# Altium PCB Jacks.PcbDoc
Units mil, origin at the board's own origin, x right, y up, seen from the top; angles counter-clockwise.
Board outline 1712.6 x 4438.9 mil, 2 copper layers (Top Layer, Bottom Layer), stack 42.17 mil thick; 94 components, 63 nets, 300 pads, 111 vias.
Unrouted connection lines stored in the file: 1.
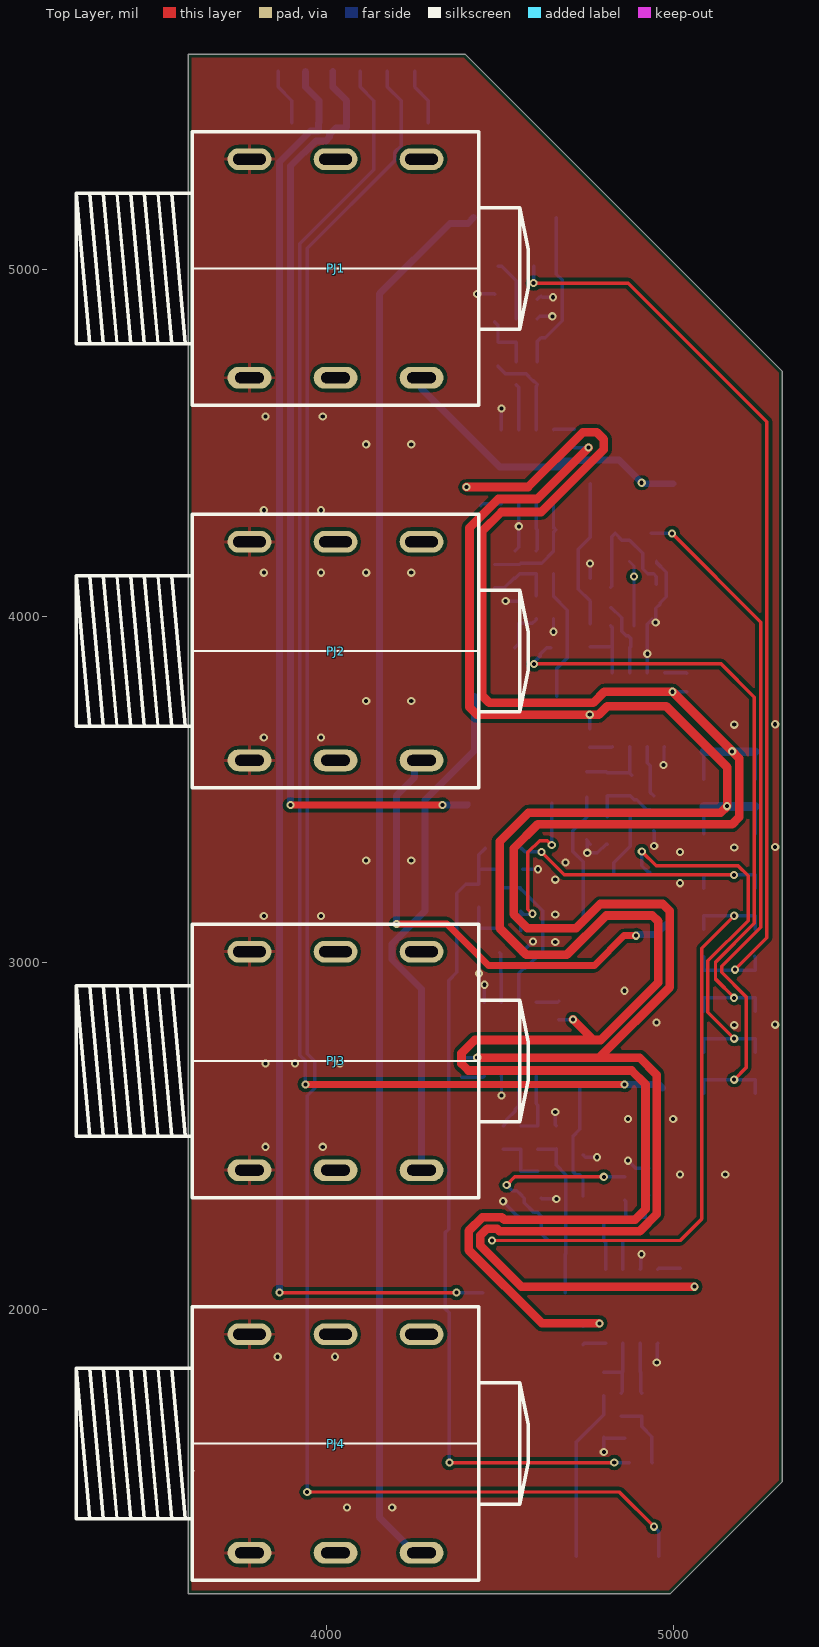
[diagram p0: Top Layer view]
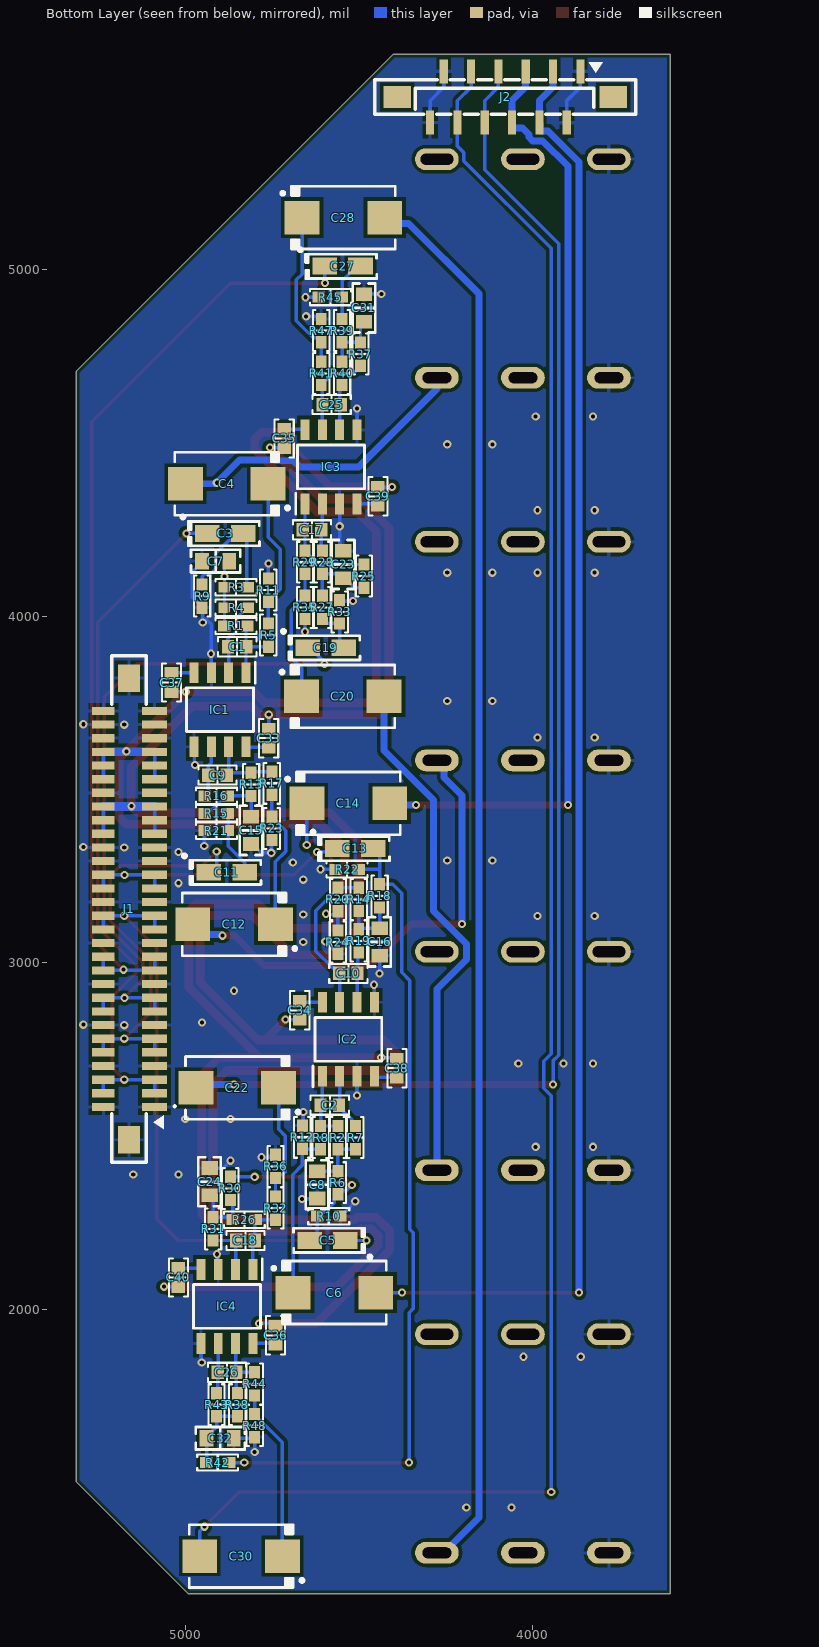
[diagram p1: Bottom Layer view, seen from below]
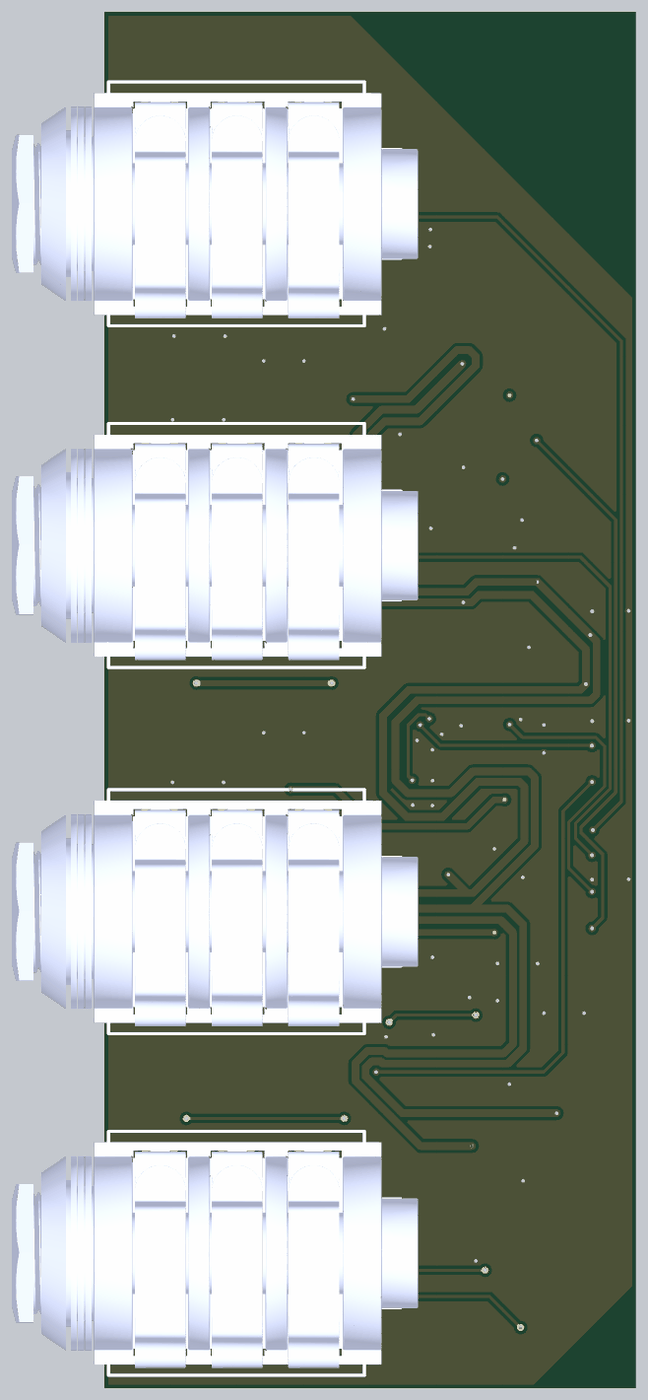
[diagram p2: 3D render of the assembled board from above, using the file's embedded part models]
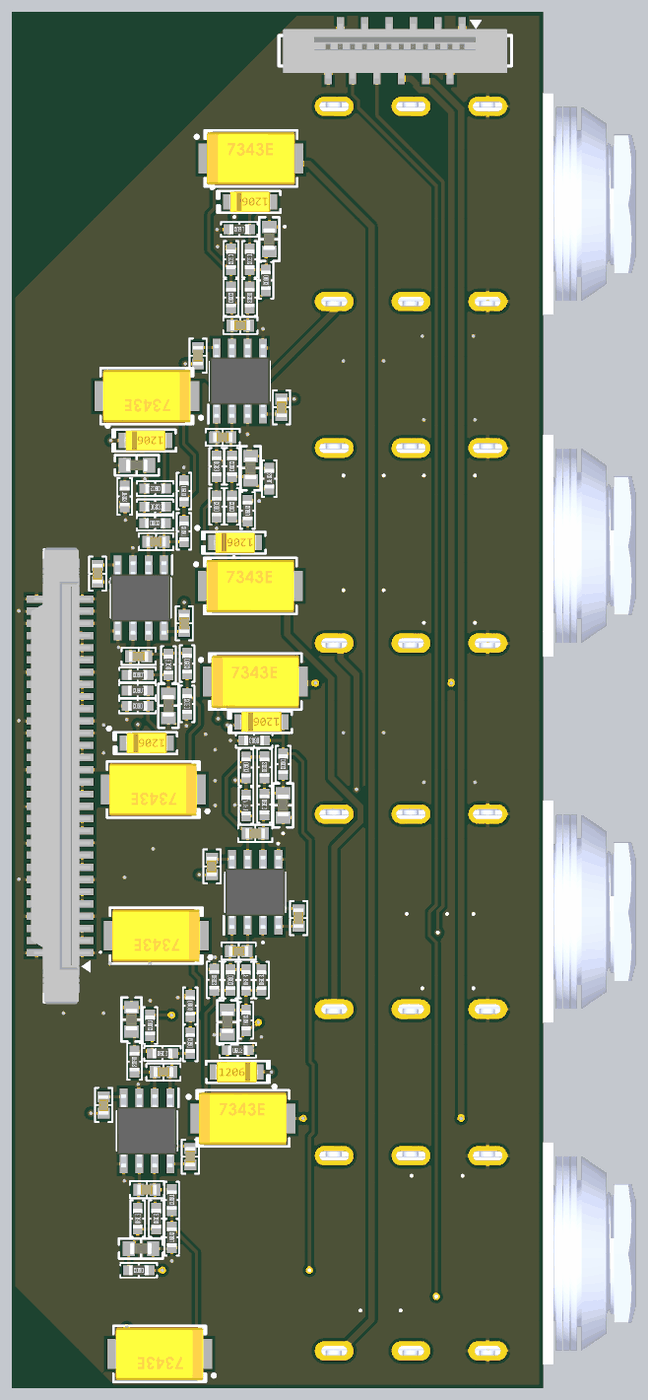
[diagram p3: 3D render of the assembled board from below, using the file's embedded part models]

## Layer stack, top to bottom
Top Solder: solder mask 0.4, Solder Resist, Dk 3.5
Top Layer: signal copper 1.4
Dielectric 1: dielectric 39.3701, FR-4, Dk 4.8
Bottom Layer: signal copper 1.4
Bottom Solder: solder mask 0.4, Solder Resist, Dk 3.5

## Board outline
3602.36,1181.1 3602.36,5620 4400,5620 5314.96,4705.04 5314.96,1504.96 4991.1,1181.1

## Design rules (kind name [scope] priority, off if disabled: settings)
BoardOutlineClearance [All] p1: gap=10 ignorepadtopadclearanceinfootprint=FALSE except(0: Arc-SplitContinuation Track-SplitContinuation SMDPad-SplitContinuation THPad-SplitContinuation Via-SplitContinuation Fill-SplitContinuation Poly-SplitContinuation Region-SplitContinuation Text-SplitContinuation)
Clearance [All] p1: gap=10 ignorepadtopadclearanceinfootprint=TRUE except(8: Arc-Arc Arc-Track Arc-SMDPad Track-Track Track-SMDPad)
HoleSize [All] p1: absolutevalues=TRUE maxlimit=157.48 minlimit=1 maxpercent=80.000 minpercent=20.000
MinimumSolderMaskSliver [All] p1: minsoldermaskwidth=4
PolygonConnect PolygonConnect_11 [All vs InNet('+5V')] p1: thpad.connectstyle=Relief thpad.reliefconductorwidth=10 thpad.reliefentries=4 thpad.polygonreliefangle="90 Angle" thpad.airgapwidth=10 smdpad.connectstyle=Relief smdpad.reliefconductorwidth=10 smdpad.reliefentries=4 smdpad.polygonreliefangle="90 Angle" smdpad.airgapwidth=10 via.connectstyle=Direct via.reliefconductorwidth=10 via.reliefentries=4 via.polygonreliefangle="90 Angle" via.airgapwidth=10
PolygonConnect PolygonConnect_10 [All vs InNet('+3V3_CODEC')] p2: thpad.connectstyle=Relief thpad.reliefconductorwidth=10 thpad.reliefentries=4 thpad.polygonreliefangle="90 Angle" thpad.airgapwidth=10 smdpad.connectstyle=Relief smdpad.reliefconductorwidth=10 smdpad.reliefentries=4 smdpad.polygonreliefangle="90 Angle" smdpad.airgapwidth=10 via.connectstyle=Direct via.reliefconductorwidth=10 via.reliefentries=4 via.polygonreliefangle="90 Angle" via.airgapwidth=10
PolygonConnect PolygonConnect_9 [All vs InNet('GND_A')] p3: thpad.connectstyle=Relief thpad.reliefconductorwidth=10 thpad.reliefentries=4 thpad.polygonreliefangle="90 Angle" thpad.airgapwidth=10 smdpad.connectstyle=Relief smdpad.reliefconductorwidth=10 smdpad.reliefentries=4 smdpad.polygonreliefangle="90 Angle" smdpad.airgapwidth=10 via.connectstyle=Direct via.reliefconductorwidth=10 via.reliefentries=4 via.polygonreliefangle="90 Angle" via.airgapwidth=10
PolygonConnect PolygonConnect_8 [All vs InNet('GND')] p4: thpad.connectstyle=Relief thpad.reliefconductorwidth=10 thpad.reliefentries=4 thpad.polygonreliefangle="90 Angle" thpad.airgapwidth=10 smdpad.connectstyle=Relief smdpad.reliefconductorwidth=10 smdpad.reliefentries=4 smdpad.polygonreliefangle="90 Angle" smdpad.airgapwidth=10 via.connectstyle=Direct via.reliefconductorwidth=10 via.reliefentries=4 via.polygonreliefangle="90 Angle" via.airgapwidth=10
PolygonConnect PolygonConnect_7 [All vs InNet('+MCU')] p5: thpad.connectstyle=Relief thpad.reliefconductorwidth=10 thpad.reliefentries=4 thpad.polygonreliefangle="90 Angle" thpad.airgapwidth=10 smdpad.connectstyle=Relief smdpad.reliefconductorwidth=10 smdpad.reliefentries=4 smdpad.polygonreliefangle="90 Angle" smdpad.airgapwidth=10 via.connectstyle=Direct via.reliefconductorwidth=10 via.reliefentries=4 via.polygonreliefangle="90 Angle" via.airgapwidth=10
PolygonConnect PolygonConnect_6 [All vs InNet('+5V')] p6: thpad.connectstyle=Relief thpad.reliefconductorwidth=10 thpad.reliefentries=4 thpad.polygonreliefangle="90 Angle" thpad.airgapwidth=10 smdpad.connectstyle=Relief smdpad.reliefconductorwidth=10 smdpad.reliefentries=4 smdpad.polygonreliefangle="90 Angle" smdpad.airgapwidth=10 via.connectstyle=Direct via.reliefconductorwidth=10 via.reliefentries=4 via.polygonreliefangle="90 Angle" via.airgapwidth=10
PolygonConnect PolygonConnect_5 [All vs IsNamedPolygon('+5V_L01_P002')] p7: thpad.connectstyle=Relief thpad.reliefconductorwidth=10 thpad.reliefentries=4 thpad.polygonreliefangle="90 Angle" thpad.airgapwidth=10 smdpad.connectstyle=Direct smdpad.reliefconductorwidth=10 smdpad.reliefentries=4 smdpad.polygonreliefangle="90 Angle" smdpad.airgapwidth=10 via.connectstyle=Direct via.reliefconductorwidth=10 via.reliefentries=4 via.polygonreliefangle="90 Angle" via.airgapwidth=10
PolygonConnect PolygonConnect_4 [All vs IsNamedPolygon('V_USB_L01_P001')] p8: thpad.connectstyle=Relief thpad.reliefconductorwidth=10 thpad.reliefentries=4 thpad.polygonreliefangle="90 Angle" thpad.airgapwidth=10 smdpad.connectstyle=Direct smdpad.reliefconductorwidth=10 smdpad.reliefentries=4 smdpad.polygonreliefangle="90 Angle" smdpad.airgapwidth=10 via.connectstyle=Direct via.reliefconductorwidth=10 via.reliefentries=4 via.polygonreliefangle="90 Angle" via.airgapwidth=10
PolygonConnect PolygonConnect_3 [All vs IsNamedPolygon('NETD1_1_L01_P003')] p9: thpad.connectstyle=Relief thpad.reliefconductorwidth=10 thpad.reliefentries=4 thpad.polygonreliefangle="90 Angle" thpad.airgapwidth=10 smdpad.connectstyle=Direct smdpad.reliefconductorwidth=10 smdpad.reliefentries=4 smdpad.polygonreliefangle="90 Angle" smdpad.airgapwidth=10 via.connectstyle=Direct via.reliefconductorwidth=10 via.reliefentries=4 via.polygonreliefangle="90 Angle" via.airgapwidth=10
PolygonConnect PolygonConnect_2 [All vs IsNamedPolygon('GND_L01_P005')] p10: thpad.connectstyle=Relief thpad.reliefconductorwidth=10 thpad.reliefentries=4 thpad.polygonreliefangle="90 Angle" thpad.airgapwidth=10 smdpad.connectstyle=Direct smdpad.reliefconductorwidth=10 smdpad.reliefentries=4 smdpad.polygonreliefangle="90 Angle" smdpad.airgapwidth=10 via.connectstyle=Direct via.reliefconductorwidth=10 via.reliefentries=4 via.polygonreliefangle="90 Angle" via.airgapwidth=10
PolygonConnect PolygonConnect_1 [All vs IsNamedPolygon('6V6_L01_P001')] p11: thpad.connectstyle=Relief thpad.reliefconductorwidth=10 thpad.reliefentries=4 thpad.polygonreliefangle="90 Angle" thpad.airgapwidth=10 smdpad.connectstyle=Direct smdpad.reliefconductorwidth=10 smdpad.reliefentries=4 smdpad.polygonreliefangle="90 Angle" smdpad.airgapwidth=10 via.connectstyle=Direct via.reliefconductorwidth=10 via.reliefentries=4 via.polygonreliefangle="90 Angle" via.airgapwidth=10
PolygonConnect [All] p12: connectstyle=Relief reliefconductorwidth=10 reliefentries=4 polygonreliefangle="90 Angle" airgapwidth=10
RoomDefinition Jacks [InComponentClass('Jacks')] p1: confinementstyle=ConfineIn formatcopy=TRUE lockcomponents=FALSE outline 0,0 2000,0 2000,1000 0,1000
RoutingVias [All] p1: holewidth=11.81 width=23.62 viastyle="Through Hole" minholewidth=11.81 minwidth=23.62 maxholewidth=11.81 maxwidth=23.62
SolderMaskExpansion [All] p1: expansion=2 istentingtop=FALSE
Width [All] p1: maxlimit=50 minlimit=8 preferedwidth=8
28 further rules are at their usual default settings.

## Components (designator, comment, footprint, x,y, rotation, side; value= is the part's Value field where it differs from the comment)
C1 "22 pF" "CAP 0603_1608" 4850.47,3911.42 r0 bottom
C2 "22 pF" "CAP 0603_1608" 4583.43,2590 r180 bottom
C3 "10µF" "CAP POL 1206_3216" 4884.73,4238.22 r180 bottom
C4 "47µF" "CAP POL 2917_7343" 4880.47,4381.42 r0 bottom
C5 "10µF" "CAP POL 1206_3216" 4590,2200 r0 bottom
C6 "47µF" "CAP POL 2917_7343" 4570,2050 r180 bottom
C7 "10000 pF" "MURATA GRM188 0603_1608" 4912.52,4158.22 r180 bottom
C8 "10000 pF" "MURATA GRM188 0603_1608" 4620,2360.63 r90 bottom
C9 "22 pF" "CAP 0603_1608" 4907.05,3541.42 r0 bottom
C10 "22 pF" "CAP 0603_1608" 4530,2970 r180 bottom
C11 "10µF" "CAP POL 1206_3216" 4880.47,3261.42 r180 bottom
C12 "47µF" "CAP POL 2917_7343" 4859.57,3111.42 r0 bottom
C13 "10µF" "CAP POL 1206_3216" 4510,3330 r180 bottom
C14 "47µF" "CAP POL 2917_7343" 4530,3460 r180 bottom
C15 "10000 pF" "MURATA GRM188 0603_1608" 4810.47,3382.05 r90 bottom
C16 "10000 pF" "MURATA GRM188 0603_1608" 4440,3060.63 r90 bottom
C17 "22 pF" "CAP 0603_1608" 4635,4248.58 r180 bottom
C18 "22 pF" "CAP 0603_1608" 4826.57,2200 r0 bottom
C19 "10µF" "CAP POL 1206_3216" 4595,3908.58 r180 bottom
C20 "47µF" "CAP POL 2917_7343" 4545.91,3768.58 r180 bottom
C22 "47µF" "CAP POL 2917_7343" 4850,2640 r0 bottom
C23 "10000 pF" "MURATA GRM188 0603_1608" 4545,4148.58 r270 bottom
C24 "10000 pF" "MURATA GRM188 0603_1608" 4930,2369.37 r270 bottom
C25 "22 pF" "CAP 0603_1608" 4578.19,4609.53 r180 bottom
C26 "22 pF" "CAP 0603_1608" 4880,1820 r0 bottom
C27 "10µF" "CAP POL 1206_3216" 4546.57,5008.58 r180 bottom
C28 "47µF" "CAP POL 2917_7343" 4544.09,5148.58 r180 bottom
C30 "47µF" "CAP POL 2917_7343" 4839.09,1290 r0 bottom
C31 "10000 pF" "MURATA GRM188 0603_1608" 4485,4887.95 r270 bottom
C32 "10000 pF" "MURATA GRM188 0603_1608" 4899.37,1630 r0 bottom
C33 "0.1 µF" "CAP 0603_1608" 4759.57,3647.99 r90 bottom
C34 "0.1 µF" "CAP 0603_1608" 4670,2863.43 r270 bottom
C35 "0.1 µF" "CAP 0603_1608" 4715,4512.01 r270 bottom
C36 "0.1 µF" "CAP 0603_1608" 4740,1926.57 r90 bottom
C37 "0.1 µF" "CAP 0603_1608" 5039.57,3808.27 r90 bottom
C38 "0.1 µF" "CAP 0603_1608" 4390,2696.57 r270 bottom
C39 "0.1 µF" "CAP 0603_1608" 4445,4345.16 r270 bottom
C40 "0.1 µF" "CAP 0603_1608" 5020,2093.43 r90 bottom
IC1 "NE5532DRE4" SOIC127P600X175-8N 4900,3730 r270 bottom
IC2 "NE5532DRE4" SOIC127P600X175-8N 4530,2780 r90 bottom
IC3 "NE5532DRE4" SOIC127P600X175-8N 4580,4430 r90 bottom
IC4 "NE5532DRE4" SOIC127P600X175-8N 4880,2010 r270 bottom
J1 "3-1734248-0" 317342480 5148.62,3155.72 r270 bottom
J2 "0528081271" AFA11-S12GLA-00 3861.26,5570 r0 bottom
PJ1 "PJ-609AE" PJ609AE 3778.72,4686.87 r0 top
PJ2 "PJ-609AE" PJ609AE 3778.72,3584.08 r0 top
PJ3 "PJ-609AE" PJ609AE 3778.72,2402.56 r0 top
PJ4 "PJ-609AE" PJ609AE 3778.72,1299.77 r0 top
R1 "6.81 kOhms" "YAGEO RES 0603_1608" 4853.94,3971.42 r180 bottom
R2 "6.81 kOhms" "YAGEO RES 0603_1608" 4560,2496.54 r90 bottom
R3 "1.47 kOhms" "YAGEO RES 0603_1608" 4853.31,4083.03 r0 bottom
R4 "221 Ohms" "YAGEO RES 0603_1608" 4853.31,4023.97 r180 bottom
R5 "1 kOhms" "YAGEO RES 0603_1608" 4760.47,3944.88 r90 bottom
R6 "1.47 kOhms" "YAGEO RES 0603_1608" 4560,2366.54 r90 bottom
R7 "221 Ohms" "YAGEO RES 0603_1608" 4510,2496.54 r90 bottom
R8 "1 kOhms" "YAGEO RES 0603_1608" 4610,2496.54 r270 bottom
R9 "51 kOhms" "YAGEO RES 0603_1608" 4951.74,4057.44 r270 bottom
R10 "51 kOhms" "YAGEO RES 0603_1608" 4586.54,2270 r180 bottom
R11 "191 Ohms" "YAGEO RES 0603_1608" 4760.47,4074.88 r270 bottom
R12 "191 Ohms" "YAGEO RES 0603_1608" 4662.47,2497.54 r270 bottom
R13 "6.81 kOhms" "YAGEO RES 0603_1608" 4810.47,3514.88 r90 bottom
R14 "6.81 kOhms" "YAGEO RES 0603_1608" 4500,3183.46 r90 bottom
R15 "1.47 kOhms" "YAGEO RES 0603_1608" 4910.16,3431.42 r0 bottom
R16 "221 Ohms" "YAGEO RES 0603_1608" 4910.16,3481.42 r0 bottom
R17 "1 kOhms" "YAGEO RES 0603_1608" 4750.47,3517.95 r270 bottom
R18 "1.47 kOhms" "YAGEO RES 0603_1608" 4440,3193.46 r270 bottom
R19 "221 Ohms" "YAGEO RES 0603_1608" 4500,3063.46 r270 bottom
R20 "1 kOhms" "YAGEO RES 0603_1608" 4559.9,3182.93 r270 bottom
R21 "51 kOhms" "YAGEO RES 0603_1608" 4910.16,3381.42 r0 bottom
R22 "51 kOhms" "YAGEO RES 0603_1608" 4533.46,3270 r0 bottom
R23 "191 Ohms" "YAGEO RES 0603_1608" 4750.47,3387.95 r90 bottom
R24 "191 Ohms" "YAGEO RES 0603_1608" 4560,3060 r90 bottom
R25 "6.81 kOhms" "YAGEO RES 0603_1608" 4485,4115.12 r90 bottom
R26 "6.81 kOhms" "YAGEO RES 0603_1608" 4830,2260 r180 bottom
R27 "1.47 kOhms" "YAGEO RES 0603_1608" 4605,4025.12 r90 bottom
R28 "221 Ohms" "YAGEO RES 0603_1608" 4605,4155.12 r90 bottom
R29 "1 kOhms" "YAGEO RES 0603_1608" 4655,4155.12 r270 bottom
R30 "1.47 kOhms" "YAGEO RES 0603_1608" 4870,2350 r270 bottom
R31 "221 Ohms" "YAGEO RES 0603_1608" 4920,2233.46 r270 bottom
R32 "1 kOhms" "YAGEO RES 0603_1608" 4740,2293.46 r90 bottom
R33 "51 kOhms" "YAGEO RES 0603_1608" 4555,4012.05 r90 bottom
R35 "191 Ohms" "YAGEO RES 0603_1608" 4655,4025.12 r90 bottom
R36 "191 Ohms" "YAGEO RES 0603_1608" 4740,2413.46 r270 bottom
R37 "6.81 kOhms" "YAGEO RES 0603_1608" 4495,4755.12 r270 bottom
R38 "6.81 kOhms" "YAGEO RES 0603_1608" 4850,1726.54 r90 bottom
R39 "1.47 kOhms" "YAGEO RES 0603_1608" 4548.19,4822.99 r270 bottom
R40 "221 Ohms" "YAGEO RES 0603_1608" 4548.19,4699.53 r270 bottom
R41 "1 kOhms" "YAGEO RES 0603_1608" 4608.19,4699.53 r90 bottom
R42 "1.47 kOhms" "YAGEO RES 0603_1608" 4906.54,1560 r0 bottom
R43 "221 Ohms" "YAGEO RES 0603_1608" 4910,1726.54 r90 bottom
R44 "1 kOhms" "YAGEO RES 0603_1608" 4800,1786.54 r270 bottom
R45 "51 kOhms" "YAGEO RES 0603_1608" 4581.65,4919.53 r0 bottom
R47 "191 Ohms" "YAGEO RES 0603_1608" 4608.19,4822.99 r270 bottom
R48 "191 Ohms" "YAGEO RES 0603_1608" 4800,1666.54 r90 bottom

## Footprints (in the part's own frame and the unit in brackets; to place one, negate y for a bottom-side part, rotate by r counter-clockwise, add the part's x,y. Pads: shape width x height; smd on the part's side, far side on the other; paste and mask are expansions set on the pad)
317342480 [mm]
  rect 0.6x1.85 smd: 1(14.5,1.525) 3(13.5,1.525) 5(12.5,1.525) 7(11.5,1.525) 9(10.5,1.525) 11(9.5,1.525) 13(8.5,1.525) 15(7.5,1.525) 17(6.5,1.525) 19(5.5,1.525) 21(4.5,1.525) 23(3.5,1.525) 25(2.5,1.525) 27(1.5,1.525) 29(0.5,1.525) 31(-0.5,1.525) 33(-1.5,1.525) 35(-2.5,1.525) 37(-3.5,1.525) 39(-4.5,1.525) 41(-5.5,1.525) 43(-6.5,1.525) 45(-7.5,1.525) 47(-8.5,1.525) 49(-9.5,1.525) 51(-10.5,1.525) 53(-11.5,1.525) 55(-12.5,1.525) 57(-13.5,1.525) 59(-14.5,1.525)
  rect 0.6x1.65 smd: 2(14.5,-2.225) 4(13.5,-2.225) 6(12.5,-2.225) 8(11.5,-2.225) 10(10.5,-2.225) 12(9.5,-2.225) 14(8.5,-2.225) 16(7.5,-2.225) 18(6.5,-2.225) 20(5.5,-2.225) 22(4.5,-2.225) 24(3.5,-2.225) 26(2.5,-2.225) 28(1.5,-2.225) 30(0.5,-2.225) 32(-0.5,-2.225) 34(-1.5,-2.225) 36(-2.5,-2.225) 38(-3.5,-2.225) 40(-4.5,-2.225) 42(-5.5,-2.225) 44(-6.5,-2.225) 46(-7.5,-2.225) 48(-8.5,-2.225) 50(-9.5,-2.225) 52(-10.5,-2.225) 54(-11.5,-2.225) 56(-12.5,-2.225) 58(-13.5,-2.225) 60(-14.5,-2.225)
  rect 2x1.6 smd paste+0 mask+0.05: 31(-16.9,-0.35) 32(16.9,-0.35)
  silkscreen extent -18.54,-1.6 18.54,3.05, body extent -18.7,-2.68 18.7,2.17, height 5.68
AFA11-S12GLA-00 [mm]
  rect 0.6x1.75 smd paste+0 mask+0.05: 1(0,0) 2(1,3.75) 3(2,0) 4(3,3.75) 5(4,0) 6(5,3.75) 7(6,0) 8(7,3.75) 9(8,0) 10(9,3.75) 11(10,0) 12(11,3.75)
  rect 2x1.6 smd paste+0 mask+0.05: 13(13.4,1.875) 14(-2.4,1.875)
  silkscreen extent -4.04,-0.66 15.04,3.13, body extent -3.69,-0.35 14.71,4.16, height 5.35
"CAP 0603_1608" [mm] "Chip Capacitor, 2-Leads, Body 1.60x0.80mm, IPC Medium Density"
  rect 0.9x1 smd: 1(-0.675,0) 2(0.675,0)
  silkscreen extent -1.4,-0.7 1.4,0.7, body extent -0.8,-0.41 0.8,0.41, height 0.82
"CAP POL 1206_3216" [mm] "Molded Capacitor, 2-Leads, Body 3.20x1.6mm, IPC Medium Density"
  rect 1.8x1.23 smd: 1(-1.31,0) 2(1.31,0)
  silkscreen extent -3.23,-0.9 2.5,1.32, body extent -1.72,-0.85 1.71,0.85, height 1.7
"CAP POL 2917_7343" [mm] "Molded Capacitor, 2-Leads, Body 7.30x4.30mm, IPC Medium Density"
  rect 2.55x2.45 smd: 1(-3.025,0) 2(3.025,0)
  silkscreen extent -4.57,-2.3 3.8,2.3, body extent -3.65,-2.15 3.65,2.15, height 4.1
"MURATA GRM188 0603_1608" [mm] "Chip Capacitor, 2-Leads, Body 1.60x0.80mm"
  rect 1x1.2 smd: 1(-1,0) 2(1,0)
  silkscreen extent -1.8,-0.83 1.8,0.83, body extent -0.9,-0.5 0.9,0.5, height 1
PJ609AE [mm] "HOOYA"
  oval 3.2x1.6 hole 0.8 slot 2.1 at 0 deg paste-2539.97 mask+0.051: 2(0,0) 4(6.3,0) 6(12.6,0)
  oval 3.2x1.6 hole 0.8 slot 2.4 at 0 deg paste-2539.97 mask+0.051: 3(0,16) 5(6.3,16) 7(12.6,16)
  silkscreen extent -12.7,-2 20.4,18, body extent -12.16,-1.4 21.2,17.09, height 16.2
SOIC127P600X175-8N [mm]
  rect 1.525x0.65 smd: 1(-2.712,1.905) 2(-2.712,0.635) 3(-2.712,-0.635) 4(-2.712,-1.905) 5(2.712,-1.905) 6(2.712,-0.635) 7(2.712,0.635) 8(2.712,1.905)
  silkscreen extent -3.47,-2.45 1.6,2.58, body extent -3,-2.45 3,2.45, height 1.75
"YAGEO RES 0603_1608" [mm] "Chip Resistor, 2-Leads, Body 1.60x0.80mm"
  rect 0.9x0.8 smd: 1(-0.85,0) 2(0.85,0)
  silkscreen extent -1.5,-0.6 1.5,0.6, body extent -0.8,-0.4 0.8,0.4, height 0.45

## Part data
C1 C2 C9 C10 C17 C18 C25 C26: library part CC0603GRNPO9BN220, "CAP CER 22PF 50V C0G/NPO 0603", Device Package="0603 (1608 Metric)", Manufacturer=Yageo, Operating Temperature="-55°C ~ 125°C", Supplier Part Number 1=311-3925-1-ND, Temperature Coefficient="C0G, NP0", Tolerance=±2%, Voltage - Rated=50V, Applications="General Purpose", Capacitance="22 pF", ComponentLink1Description=Datasheet, ComponentLink1URL=https://www.yageo.com/upload/media/product/productsearch/datasheet/mlcc/UPY-GP_NP0_16V-to-50V_17.pdf, ComponentLink2Description="DigiKey Link", ComponentLink2URL=https://www.digikey.com/en/products/detail/yageo/CC0603GRNPO9BN220/5883550, LastUpdated="2/9/2024 8:10:28 PM", Lifecycle Status=Active, Minimum Order=1, Mounting Type="Surface Mount, MLCC", Package / Case="0603 (1608 Metric)", Packaging=TapeAndReel, Part Number=CC0603GRNPO9BN220, Part Status=Active, PartId=3677, Price=0.01, Series=CC, Size / Dimension="0.063\" L x 0.031\" W (1.60mm x 0.80mm)", Supplier 1=DigiKey, Thickness (Max)="0.035\" (0.90mm)"
C3 C5 C11 C13 C19 C27: library part T491A106K010AT, "CAP TANT 10UF 10% 10V 1206", Device Package="1206 (3216 Metric)", ESR (Equivalent Series Resistance)=3.8Ohm, Lifetime @ Temp.="2000 Hrs @ 125°C", Manufacturer=KEMET, Manufacturer Size Code=A, Operating Temperature="-55°C ~ 125°C", Supplier Part Number 1=399-3684-1-ND, Tolerance=±10%, Voltage - Rated=10V, Capacitance=10µF, ComponentLink1Description=Datasheet, ComponentLink1URL=https://api.kemet.com/component-edge/download/datasheet/T491A106K010AT.pdf, ComponentLink2Description="DigiKey Link", ComponentLink2URL=http://digikey.com/product-detail/en/kemet/T491A106K010AT/399-3684-1-ND/819009, Features="General Purpose", Height - Seated (Max)="0.071\" (1.80mm)", LastUpdated="9/2/2020 1:15:58 AM", Lifecycle Status=Active, Minimum Order=1, Mounting Type="Surface Mount", Package / Case="1206 (3216 Metric)", Packaging=TapeAndReel, Part Number=T491A106K010AT, Part Status=Active, PartId=330, Price=0.07, Series=T491, Size / Dimension="0.126\" L x 0.063\" W (3.20mm x 1.60mm)", Supplier 1=DigiKey, Type=Molded
C4 C6 C12 C14 C20 C22 C28 C30: library part 293D476X9010D2TE3, "CAP TANT 47UF 10% 10V 2917", Device Package="2917 (7343 Metric)", ESR (Equivalent Series Resistance)=700mOhm, Manufacturer="Vishay Sprague", Manufacturer Size Code=D, Operating Temperature="-55°C ~ 125°C", Supplier Part Number 1=718-1088-1-ND, Tolerance=±10%, Voltage - Rated=10V, Capacitance=47µF, ComponentLink1Description=Datasheet, ComponentLink1URL=http://www.vishay.com/docs/40002/293d.pdf, ComponentLink2Description="DigiKey Link", ComponentLink2URL=http://digikey.com/product-detail/en/vishay-sprague/293D476X9010D2TE3/718-1088-1-ND/1559582, Features="General Purpose", Height - Seated (Max)="0.122\" (3.10mm)", LastUpdated="9/2/2020 1:16:14 AM", Lifecycle Status=Active, Minimum Order=1, Mounting Type="Surface Mount", Package / Case="2917 (7343 Metric)", Packaging=TapeAndReel, Part Number=293D476X9010D2TE3, Part Status=Active, PartId=2778, Price=0.22, Series="TANTAMOUNT®, 293D", Size / Dimension="0.287\" L x 0.169\" W (7.30mm x 4.30mm)", Supplier 1=DigiKey, Type=Molded
C7 C8 C15 C16 C23 C24 C31 C32: library part GRM1885C1H103JA01D, "CAP CER 10000PF 50V C0G/NP0 0603", Device Package="0603 (1608 Metric)", Manufacturer="Murata Electronics", Operating Temperature="-55°C ~ 125°C", Supplier Part Number 1=490-9666-1-ND, Temperature Coefficient="C0G, NP0", Tolerance=±5%, Voltage - Rated=50V, Applications="General Purpose", Capacitance="10000 pF", ComponentLink1Description=Datasheet, ComponentLink1URL=https://www.murata.com/~/media/webrenewal/support/library/catalog/products/capacitor/mlcc/c02e.ashx?la=en-us, ComponentLink2Description="DigiKey Link", ComponentLink2URL=https://www.digikey.com/en/products/detail/murata-electronics/GRM1885C1H103JA01D/4421555, LastUpdated="7/20/2024 12:23:21 AM", Lifecycle Status=Active, Minimum Order=1, Mounting Type="Surface Mount, MLCC", Package / Case="0603 (1608 Metric)", Packaging=TapeAndReel, Part Number=GRM1885C1H103JA01D, Part Status=Active, PartId=11077, Price=0.02, Series=GRM, Size / Dimension="0.063\" L x 0.031\" W (1.60mm x 0.80mm)", Supplier 1=DigiKey, Thickness (Max)="0.035\" (0.90mm)"
C33 C34 C35 C36 C37 C38 C39 C40: library part C0603C104K5RAC7411, "CAP CER 0.1UF 50V X7R 0603", Device Package="0603 (1608 Metric)", Manufacturer=KEMET, Operating Temperature="-55°C ~ 125°C", Supplier Part Number 1=399-C0603C104K5RAC7411CT-ND, Temperature Coefficient=X7R, Tolerance=±10%, Voltage - Rated=50V, Applications="Bypass, Decoupling", Capacitance="0.1 µF", ComponentLink1Description=Datasheet, ComponentLink1URL=https://api.kemet.com/component-edge/download/datasheet/C0603C104K5RAC7411.pdf, ComponentLink2Description="DigiKey Link", ComponentLink2URL=https://www.digikey.com/en/products/detail/kemet/C0603C104K5RAC7411/3317013, LastUpdated="2/9/2024 8:10:30 PM", Lifecycle Status=Active, Minimum Order=1, Mounting Type="Surface Mount, MLCC", Package / Case="0603 (1608 Metric)", Packaging=TapeAndReel, Part Number=C0603C104K5RAC7411, Part Status=Active, PartId=2233, Price=0.01, Series="SMD Comm X7R", Size / Dimension="0.063\" L x 0.031\" W (1.60mm x 0.80mm)", Supplier 1=DigiKey, Thickness (Max)="0.035\" (0.90mm)"
IC1 IC2 IC3 IC4: "Integrated Circuit", Manufacturer_Name="Texas Instruments", Mouser Part Number=595-NE5532DRE4, Arrow Part Number=NE5532DRE4, Arrow Price/Stock=https://www.arrow.com/en/products/ne5532dre4/texas-instruments, Datasheet Link=https://www.ti.com/lit/ds/symlink/ne5532.pdf?HQS=dis-mous-null-mousermode-dsf-pf-null-wwe&ts=1618482303902&ref_url=https%253A%252F%252Fwww.mouser.com%252F, Height=1.75mm, Manufacturer_Part_Number=NE5532DRE4, Mouser Price/Stock=https://www.mouser.co.uk/ProductDetail/Texas-Instruments/NE5532DRE4?qs=7nS3%252BbEUL6spPf9Rt7S6cg%3D%3D
J1: "Connector", Manufacturer_Name="TE Connectivity", Mouser Part Number=571-3-1734248-0, Arrow Part Number=3-1734248-0, Arrow Price/Stock=https://www.arrow.com/en/products/3-1734248-0/te-connectivity, Datasheet Link=https://www.te.com/commerce/DocumentDelivery/DDEController?Action=srchrtrv&DocNm=5-1773461-0_Standard_FPC_Connectors_QRG&DocType=Data%20Sheet&DocLang=English&PartCntxt=3-1734248-0&DocFormat=pdf, Height=7.7mm, Manufacturer_Part_Number=3-1734248-0, Mouser Price/Stock=https://www.mouser.co.uk/ProductDetail/TE-Connectivity/3-1734248-0?qs=rVE9j%252BL6g1a4TQRjUuGYiA%3D%3D, System=Connector
J2: "Connector", Manufacturer_Name=Molex, Datasheet Link=https://www.molex.com/pdm_docs/sd/528082071_sd.pdf, Height=5.3mm, Manufacturer_Part_Number=0528081271, System=Connector
PJ1 PJ2 PJ3 PJ4: "6.3mm jack HOOYA"
R1 R2 R13 R14 R25 R26 R37 R38: library part AC0603FR-076K81L, "RES SMD 6.81K OHM 1% 1/10W 0603", Device Package="0603 (1608 Metric)", Manufacturer=Yageo, Operating Temperature="-55°C ~ 155°C", Power (Watts)="0.1W, 1/10W", Ratings=AEC-Q200, Supplier Device Package=0603, Supplier Part Number 1=YAG3626CT-ND, Temperature Coefficient=±100ppm/°C, Tolerance=±1%, ComponentLink1Description=Datasheet, ComponentLink1URL=https://www.yageo.com/upload/media/product/productsearch/datasheet/rchip/PYu-AC_51_RoHS_L_7.pdf, ComponentLink2Description="DigiKey Link", ComponentLink2URL=https://www.digikey.com/en/products/detail/yageo/AC0603FR-076K81L/5896265, Composition="Thick Film", Features="Automotive AEC-Q200, Moisture Resistant", Height - Seated (Max)="0.022\" (0.55mm)", LastUpdated="7/25/2024 9:19:28 AM", Lifecycle Status=Active, Minimum Order=1, Number of Terminations=2, Package / Case="0603 (1608 Metric)", Packaging=CutTape, Part Number=AC0603FR-076K81L, Part Status=Active, PartId=11704, Price=0.01, Resistance="6.81 kOhms", Series=AC, Size / Dimension="0.063\" L x 0.031\" W (1.60mm x 0.80mm)", Supplier 1=DigiKey
R3 R6 R15 R18 R27 R30 R39 R42: library part AC0603FR-071K47L, "RES SMD 1.47K OHM 1% 1/10W 0603", Device Package="0603 (1608 Metric)", Manufacturer=Yageo, Operating Temperature="-55°C ~ 155°C", Power (Watts)="0.1W, 1/10W", Ratings=AEC-Q200, Supplier Device Package=0603, Supplier Part Number 1=13-AC0603FR-071K47LCT-ND, Temperature Coefficient=±100ppm/°C, Tolerance=±1%, ComponentLink1Description=Datasheet, ComponentLink1URL=https://www.yageo.com/upload/media/product/productsearch/datasheet/rchip/PYu-AC_51_RoHS_L_8.pdf, ComponentLink2Description="DigiKey Link", ComponentLink2URL=https://www.digikey.com/en/products/detail/yageo/AC0603FR-071K47L/5895863, Composition="Thick Film", Features="Automotive AEC-Q200, Moisture Resistant", Height - Seated (Max)="0.022\" (0.55mm)", LastUpdated="7/25/2024 9:19:11 AM", Lifecycle Status=Active, Minimum Order=1, Number of Terminations=2, Package / Case="0603 (1608 Metric)", Packaging=CutTape, Part Number=AC0603FR-071K47L, Part Status=Active, PartId=65725, Price=0.01, Resistance="1.47 kOhms", Series=AC, Size / Dimension="0.063\" L x 0.031\" W (1.60mm x 0.80mm)", Supplier 1=DigiKey
R4 R7 R16 R19 R28 R31 R40 R43: library part AC0603FR-07221RL, "RES SMD 221 OHM 1% 1/10W 0603", Device Package="0603 (1608 Metric)", Manufacturer=Yageo, Operating Temperature="-55°C ~ 155°C", Power (Watts)="0.1W, 1/10W", Ratings=AEC-Q200, Supplier Device Package=0603, Supplier Part Number 1=13-AC0603FR-07221RLCT-ND, Temperature Coefficient=±100ppm/°C, Tolerance=±1%, ComponentLink1Description=Datasheet, ComponentLink1URL=https://www.yageo.com/upload/media/product/productsearch/datasheet/rchip/PYu-AC_51_RoHS_L_10.pdf, ComponentLink2Description="DigiKey Link", ComponentLink2URL=https://www.digikey.com/en/products/detail/yageo/AC0603FR-07221RL/5895921, Composition="Thick Film", Features="Automotive AEC-Q200, Moisture Resistant", Height - Seated (Max)="0.022\" (0.55mm)", LastUpdated="7/25/2024 9:18:59 AM", Lifecycle Status=Active, Minimum Order=1, Number of Terminations=2, Package / Case="0603 (1608 Metric)", Packaging=CutTape, Part Number=AC0603FR-07221RL, PartId=87217, Price=0.01, Resistance="221 Ohms", Series=AC, Size / Dimension="0.063\" L x 0.031\" W (1.60mm x 0.80mm)", Supplier 1=DigiKey
R5 R8 R17 R20 R29 R32 R41 R44: library part AA0603FR-071KL, "RES SMD 1K OHM 1% 1/10W 0603", Device Package="0603 (1608 Metric)", Manufacturer=Yageo, Operating Temperature="-55°C ~ 155°C", Power (Watts)="0.1W, 1/10W", Ratings=AEC-Q200, Supplier Device Package=0603, Supplier Part Number 1=13-AA0603FR-071KLCT-ND, Temperature Coefficient=±150ppm/°C, Tolerance=±1%, ComponentLink1Description=Datasheet, ComponentLink1URL=https://www.yageo.com/upload/media/product/productsearch/datasheet/rchip/PYu-AA_51_RoHS_L_3.pdf, ComponentLink2Description="DigiKey Link", ComponentLink2URL=https://www.digikey.com/en/products/detail/yageo/AA0603FR-071KL/5888847, Composition="Thick Film", Features="Anti-Sulfur, Automotive AEC-Q200, Moisture Resistant", Height - Seated (Max)="0.022\" (0.55mm)", LastUpdated="7/25/2024 9:19:15 AM", Lifecycle Status=Active, Minimum Order=1, Number of Terminations=2, Package / Case="0603 (1608 Metric)", Packaging=TapeAndReel, Part Number=AA0603FR-071KL, Part Status=Active, PartId=64335, Price=0.01, Resistance="1 kOhms", Series=AA, Size / Dimension="0.063\" L x 0.031\" W (1.60mm x 0.80mm)", Supplier 1=DigiKey
R9 R10 R21 R22 R33 R45: library part AC0603FR-0751KL, "RES SMD 51K OHM 1% 1/10W 0603", Device Package="0603 (1608 Metric)", Manufacturer=Yageo, Operating Temperature="-55°C ~ 155°C", Power (Watts)="0.1W, 1/10W", Ratings=AEC-Q200, Supplier Device Package=0603, Supplier Part Number 1=YAG3616CT-ND, Temperature Coefficient=±100ppm/°C, Tolerance=±1%, ComponentLink1Description=Datasheet, ComponentLink1URL=https://www.yageo.com/upload/media/product/productsearch/datasheet/rchip/PYu-AC_51_RoHS_L_7.pdf, ComponentLink2Description="DigiKey Link", ComponentLink2URL=https://www.digikey.com/en/products/detail/yageo/AC0603FR-0751KL/5896179, Composition="Thick Film", Features="Automotive AEC-Q200, Moisture Resistant", Height - Seated (Max)="0.022\" (0.55mm)", LastUpdated="7/25/2024 9:19:23 AM", Lifecycle Status=Active, Minimum Order=1, Number of Terminations=2, Package / Case="0603 (1608 Metric)", Packaging=CutTape, Part Number=AC0603FR-0751KL, Part Status=Active, PartId=17419, Price=0.01, Resistance="51 kOhms", Series=AC, Size / Dimension="0.063\" L x 0.031\" W (1.60mm x 0.80mm)", Supplier 1=DigiKey
R11 R12 R23 R24 R35 R36 R47 R48: library part AC0603FR-07191RL, "RES SMD 191 OHM 1% 1/10W 0603", Device Package="0603 (1608 Metric)", Manufacturer=Yageo, Operating Temperature="-55°C ~ 155°C", Power (Watts)="0.1W, 1/10W", Ratings=AEC-Q200, Supplier Device Package=0603, Supplier Part Number 1=13-AC0603FR-07191RLCT-ND, Temperature Coefficient=±100ppm/°C, Tolerance=±1%, ComponentLink1Description=Datasheet, ComponentLink1URL=https://www.yageo.com/upload/media/product/productsearch/datasheet/rchip/PYu-AC_51_RoHS_L_9.pdf, ComponentLink2Description="DigiKey Link", ComponentLink2URL=https://www.digikey.com/en/products/detail/yageo/AC0603FR-07191RL/5895841, Composition="Thick Film", Features="Automotive AEC-Q200, Moisture Resistant", Height - Seated (Max)="0.022\" (0.55mm)", LastUpdated="7/25/2024 9:19:07 AM", Lifecycle Status=Active, Minimum Order=1, Number of Terminations=2, Package / Case="0603 (1608 Metric)", Packaging=CutTape, Part Number=AC0603FR-07191RL, Part Status=Active, PartId=72108, Price=0.01, Resistance="191 Ohms", Series=AC, Size / Dimension="0.063\" L x 0.031\" W (1.60mm x 0.80mm)", Supplier 1=DigiKey

## Via types
v1: diameter 23.62, hole 11.81, Top Layer to Bottom Layer, tented both sides, 101 vias
v2: diameter 23.62, hole 11.81, Top Layer to Bottom Layer, 10 vias

## Nets (pads, with @x,y where several pads share a name; then routed paths per layer and width w, separated by ;. In a path a pad name is that pad's centre, name@x,y a point inside that pad or via, vN(x,y) a via of type N, cw(c..) or ccw(c..) an arc to the next point about the centre after c; other vN are vias at no path point)
+12: C33.2 C34.2 C35.2 C36.2 J1.41 J1.42 J1.43 J1.44 J1.45 J1.46 | length 6790.3
  Top Layer w25: v1(4711.13,2836.85) 4770.3,2777.68 ; v1(4756.13,4485.43) 4608.12,4337.42 4495.85,4337.42 4413,4254.57 4413,3737 4434.31,3715.69 v1(4759.57,3715.69) 4785.69,3715.69 4810,3740 4980,3740 5155.47,3564.53 v1(5155.47,3451.89) 5136.57,3433 4583,3433 4500,3350 4500,3100 4576.7,3023.3 4693.3,3023.3 4807,3137 4940,3137 4957,3120 4957,2943.67 4791.01,2777.68 4770.3,2777.68 ; v1(4787.27,1961.16) 4621.71,1961.16 4410.75,2172.12 4410.75,2227.88 4450.18,2267.31 4505.94,2267.31 4513.25,2260 4890,2260 4920,2290 4920,2650 4880,2690 4410,2690 4390,2710 4390,2740 4427.68,2777.68 4770.3,2777.68
  Bottom Layer w10: C34.2 v1(4711.13,2836.85) ; C35.2 v1(4756.13,4485.43) ; C36.2 4748.01,1961.16 v1(4787.27,1961.16) ; C33.2 v1(4759.57,3715.69) ; J1.41 J1.45 ; J1.42 J1.44 J1.46
  Bottom Layer w25: J1.45 5154.57,3451 v1(5155.47,3451.89) 5156.36,3451 J1.46
-12: C37.1 C38.1 C39.1 C40.1 J1.49 J1.50 J1.51 J1.52 J1.53 J1.54 | length 6973.1
  Top Layer w25: v1(4403.87,4371.73) 4581.73,4371.73 4740,4530 4780,4530 4800,4510 4800,4480 4620,4300 4505.1,4300 4450,4244.9 4450,3770 4470,3750 4770,3750 4801.69,3781.69 v1(4998.44,3781.69) 5170,3610.13 v1(5170,3610) 5190,3590 5190,3420 5170,3400 4610,3400 4540,3330 4540,3140 4580,3100 4720,3100 4790,3170 4970,3170 4990,3150 4990,2930 4787.21,2727.21 ; v1(4435.19,2727.21) 4787.21,2727.21 ; v1(5061.13,2066.85) 4562.69,2066.85 4443.75,2185.79 4443.75,2214.21 4463.85,2234.31 4492.27,2234.31 4499.58,2227 4903.67,2227 4953,2276.33 4953,2677 4902.79,2727.21 4787.21,2727.21
  Bottom Layer w10: C38.1 4394.07,2727.21 v1(4435.19,2727.21) ; v1(4403.87,4371.73) C39.1 ; v1(4998.44,3781.69) C37.1 ; C40.1 v1(5061.13,2066.85) ; J1.49 J1.53 ; J1.50 J1.52 J1.54
  Bottom Layer w25: J1.53 5168.48,3608.48 v1(5170,3610) 5171.52,3608.48 J1.54
GND_A: C7.1 C8.1 C15.1 C16.1 C23.1 C24.1 C31.1 C32.1 IC1.3 IC1.5 IC2.3 IC2.5 IC3.3 IC3.5 IC4.3 IC4.5 J1.1 J1.2 J1.7 J1.8 J1.13 J1.14 J1.19 J1.20 J1.25 J1.26 J1.31 J1.32 J1.37 J1.38 J1.39 J1.40 J1.47 J1.48 J1.55 J1.56 J1.57 J1.58 J1.59 J1.60 J2.1 J2.2 J2.11 J2.12 PJ1.2 PJ1.3 PJ2.2 PJ2.3 PJ3.2 PJ3.3 PJ4.2 PJ4.3 R9.2 R10.2 R11.1 R12.1 R21.2 R22.2 R23.1 R24.1 R33.2 R35.1 R36.1 R45.2 R47.1 R48.1 | length 2089.2
  Bottom Layer w10: J2.1 3861.26,5525 3900.63,5485.63 J2.2 ; J2.11 4254.96,5525 4294.33,5485.63 J2.12 ; v1(4435,4928.58) 4483.74,4928.58 C31.1 ; v1(4440,2970) C16.1 ; IC2.5 4455.45,2887.22 4455.45,2936.72 v1(4455.89,2937.16) ; IC2.3 4505.11,2673.12 4505.11,2620.74 4505.21,2620.63 v1(4505.21,2618.19) ; IC3.5 v1(4505,4598.58) ; v1(4510,2313.07) 4510,2311.1 4551.1,2270 R10.2 ; v1(4517.17,4042.95) 4552.44,4042.95 R33.2 ; C23.1 4555,4197.95 v1(4555,4258.58) IC3.3 ; R24.1 4595.37,3061.9 v1(4596.33,3061.9) ; R22.2 v1(4610,3270) ; R47.1 4615.66,4863.93 v1(4651.58,4863.93) ; R45.2@4608.19,4912.6 R45.2 4616.06,4918.58 4619.85,4922.37 4623.16,4919.05 v1(4653.24,4919.05) ; C8.1 4621.26,2320 v1(4663.2,2320) ; v1(4655,3954.61) R35.1 ; v1(4660,2570) 4660,2533.47 R12.1 ; R36.1 4746.93,2440 v1(4780,2440) ; R23.1 4752.37,3352.59 R23.1@4752.37,3351.53 ; R11.1 v1(4760.47,4151.42) ; R23.1@4761.22,3342.68 R23.1@4752.37,3351.53 ; v1(4800,1590) R48.1 4803.07,1630 C32.1 ; C15.1 4806.54,3342.68 4781.29,3317.43 v1(4752.37,3317.43) R23.1@4752.37,3351.53 ; v1(4870,2430) 4891.26,2408.74 C24.1 ; IC4.3 4906.7,2118.48 4906.7,2158.77 v1(4908.41,2160.47) ; IC1.3 4925.5,3837.27 v1(4925.5,3891.42) 4925.5,3976.44 4940.02,3990.96 ; R21.2 4945.26,3379.78 v1(4945.26,3337.38) ; v1(4949.57,3981.42) 4949.57,4021.8 R9.2 4962.48,4034.72 4962.48,4037.82 4980.48,4055.82 4980.48,4125.7 4951.89,4154.29 C7.1 ; v1(4952.69,1848.63) 4953.84,1849.78 4953.84,1902.07 IC4.5 ; v1(4971.99,3570.83) 4973.49,3572.34 4973.49,3621.72 IC1.5
  other v1: 4060,1430 4190,1430 3860,1865 4025,1865 5020,2390 5150,2390 3825,2470 3990,2470 4870,2550 5000,2550 3825,2710 3910,2710 4040,2710 5176.01,2820.65 5294.03,2822.05 4951.92,2828.08 4860,2920 4660,3060 3820,3135 3985,3135 4660,3140 5020,3230 4660,3240 4690,3290 4115,3295 4245,3295 5020,3320 5176.01,3332.46 5294.03,3333.86 3820,3650 3985,3650 5176.01,3686.79 5294.03,3688.19 4115,3755 4245,3755 3820,4125 3985,4125 4115,4125 4245,4125 3820,4305 3985,4305 4115,4495 4245,4495 3825,4575 3990,4575
J_LOUT1: C4.2 PJ1.6 | length 886.4
  Bottom Layer w20: PJ1.6 4274.78,4655.22 4500,4430 4670,4430 4687.65,4447.65 4740.07,4447.65 4742.42,4450 4843.43,4450 v1(4909.12,4384.31) 4910,4384.31 4912.89,4381.42 C4.2
J_LOUT2: C20.2 PJ3.6 | length 1499.2
  Bottom Layer w20: PJ3.6 4274.78,2924.78 4190,3009.56 4190,3054.49 4285,3149.49 4285,3470 4426.81,3611.81 C20.2
J_ROUT1: C12.2 PJ2.6 | length 1376.7
  Top Layer w20: v1(4202.7,3112.18) 4347.82,3112.18 4467.2,2992.8 4772.8,2992.8 4858.58,3078.58 v1(4893.06,3078.58)
  Bottom Layer w20: v1(4202.7,3112.18) 4202.7,3482.7 4254.3,3534.3 4254.3,3564.22 4274.16,3584.08 PJ2.6 ; v1(4893.06,3078.58) 4894.04,3078.58 4897.26,3081.8 4949.04,3081.8 C12.2
J_ROUT2: C28.2 PJ4.6 | length 4052.7
  Bottom Layer w20: PJ4.6 4255.23,1299.77 4153.96,1401.04 4153.96,4928.96 4356.52,5131.52 4407.94,5131.52 C28.2
LOUT1: C3.1 J1.3 J1.4 J1.5 J1.6 | length 2056.9
  Top Layer w10: v1(4996.67,4238.22) 5252.24,3982.66 5252.24,3102.67 5140,2990.43 5140,2972.91 5210,2902.91 5210,2697.75 v1(5175.85,2663.6)
  Bottom Layer w10: C3.1 v1(4996.67,4238.22) ; J1.3 J1.5 v1(5175.85,2663.6) J1.6 J1.4
LOUT2: C19.1 J1.15 J1.16 J1.17 J1.18 | length 1909.6
  Top Layer w10: v1(4599.06,3861.81) 5138.19,3861.81 5234.24,3765.76 5234.24,3114.75 5122,3002.51 5122,2953.67 5175.51,2900.15 v1(5175.51,2899.48)
  Bottom Layer w10: v1(4599.06,3861.81) 4601.67,3864.42 4601.67,3870.1 4616.14,3884.57 4616.14,3889.37 4635.35,3908.58 C19.1 ; J1.15 J1.17 5088.75,2899.65 5175.35,2899.65 v1(5175.51,2899.48) 5175.85,2899.82 J1.18 J1.16
LOUT3: C5.1 J1.27 J1.28 J1.29 J1.30 | length 1829.3
  Top Layer w10: v1(4478.06,2200) 5020,2200 5082,2262 5082,3042.19 v1(5175.85,3136.04)
  Bottom Layer w10: v1(4478.06,2200) C5.1 ; J1.27 J1.29 v1(5175.85,3136.04) J1.30 J1.28
NetC1_1: C1.1 IC1.1 R1.2 R5.1 | length 199.9
  Bottom Layer w10: R5.1 C1.1 ; R1.2 4825,3966.89 IC1.1
NetC1_2: C1.2 IC1.2 R4.2 | length 216.5
  Bottom Layer w10: R4.2 4821.82,4023.97 4851.19,3994.6 4851.19,3955.78 4864.3,3942.67 4870.48,3942.67 4877.05,3936.1 C1.2 4875,3909.37 IC1.2
NetC2_1: C2.1 IC2.1 R2.2 R8.1 | length 195.3
  Bottom Layer w10: R2.2 R8.1 C2.1 4605,2595 IC2.1
NetC2_2: C2.2 IC2.2 R7.2 | length 163.4
  Bottom Layer w10: R7.2 4520.75,2540.75 4520.75,2549.4 4544.13,2572.79 4544.13,2577.28 C2.2 4555,2591.85 IC2.2
NetC3_2: C3.2 R3.1 R9.1 | length 379.8
  Bottom Layer w10: R3.1 4823.07,4086.25 4823.07,4228.14 C3.2 4852.37,4219.01 4874.06,4219.01 4912.62,4180.45 4912.62,4135.81 4927.01,4121.42 4943.94,4121.42 4951.74,4113.62 R9.1
NetC4_1: C4.1 R5.2 R11.2 | length 431.3
  Bottom Layer w10: R5.2 4760.47,4043.39 4726.86,4077 4726.86,4192.03 4761.38,4226.54 C4.1
NetC5_2: C5.2 R6.1 R10.1 R30.1 | length 575.3
  Top Layer w10: v2(4520,2360) 4543.46,2383.46 v2(4800,2383.46)
  Bottom Layer w10: v2(4520,2360) 4536.13,2343.87 4549.25,2343.87 R6.1 R6.1 4570.75,2322.32 4570.75,2308.82 4598.82,2280.75 4609.25,2280.75 R10.1 4620,2219.21 4639.21,2200 C5.2 ; v2(4800,2383.46) R30.1@4860,2383.46
NetC6_1: C6.1 R8.2 R12.2 | length 478.7
  Bottom Layer w10: R8.2 4661.47,2463.07 R12.2 4662.47,2417.53 4690.01,2389.99 4690.01,2161.87 4689.09,2160.96 C6.1
NetC7_2: C7.2 R1.1 R3.2 R4.1 | length 192.7
  Bottom Layer w8: C7.2 4886.78,4144.6 v1(4886.78,4113.81) R3.2 R4.1 4887.4,4023.35 R1.1
NetC8_2: C8.2 R2.1 R6.2 R7.1 | length 163.1
  Bottom Layer w10: R7.1 R2.1 R6.2 C8.2@4610,2400
NetC9_1: C9.1 IC1.7 R13.2 R17.1 | length 210.5
  Bottom Layer w10: R17.1 4807.4,3551.42 R13.2 4873.54,3548.35 C9.1@4875,3546.89 ; IC1.7 C9.1@4875,3546.89 ; C9.1 C9.1@4875,3546.89
NetC9_2: C9.2 IC1.6 R16.2 | length 149.5
  Bottom Layer w10: IC1.6 4925,3576.89 4933.62,3568.27 C9.2 4933.62,3491.42 R16.2
NetC10_1: C10.1 IC2.7 R14.2 R20.1 | length 447.3
  Bottom Layer w10: R14.2 4559.36,3216.93 R20.1 4559.9,3214.43 4570.64,3203.68 4623.5,3150.82 4623.5,3034.11 4574.07,2984.69 4569.29,2984.69 4556.57,2971.97 C10.1 4555,2968.43 IC2.7
NetC10_2: C10.2 IC2.6 R19.2 | length 145.3
  Bottom Layer w10: R19.2 4503.43,3026.57 C10.2 4505,2968.43 IC2.6
NetC11_2: C11.2 R15.1 R21.1 | length 189.8
  Bottom Layer w10: C11.2 4828.9,3289.16 4876.67,3336.94 R21.1 ; R21.1 R15.1
NetC12_1: C12.1 R17.2 R23.2 | length 396.8
  Bottom Layer w10: C12.1 4740.47,3291.42 4710.47,3321.42 4710.47,3381.56 4737.62,3408.7 4739.72,3408.7 4750.47,3419.45 R17.2@4750.47,3477.95
NetC13_2: C13.2 R18.1 R22.1 R42.1 | length 2424.2
  Top Layer w10: v2(4355,1560) v2(4830,1560)
  Bottom Layer w10: v2(4355,1560) 4355,1991.22 4342.35,2003.87 4342.35,2222.23 4352.77,2232.65 4352.77,2421.82 4352.55,2422.04 4352.55,2949.47 4376.5,2973.42 4376.5,3201.5 4401.93,3226.93 R18.1 4440,3269.25 ; C13.2 4440,3311.57 4440,3269.25 ; R22.1 4440.75,3270 4440,3269.25 ; v2(4830,1560) R42.1
NetC14_1: C14.1 R20.2 R24.2 | length 487.5
  Top Layer w10: v1(4594.6,3141.81) 4581.33,3155.08 4581.33,3319.25 4614.81,3352.73 4637.27,3352.73 v1(4650,3340)
  Bottom Layer w10: R20.2 R20.2@4560,3149.36 ; R24.2 R20.2@4560,3149.36 ; v1(4594.6,3141.81) 4594.6,3139.72 4569.65,3139.72 R20.2@4560,3149.36 ; v1(4650,3340) C14.1@4650,3460
NetC15_2: C15.2 R13.1 R15.2 R16.1 | length 213.9
  Bottom Layer w10: C15.2 R13.1 R16.1 4887.44,3470.67 4895.03,3470.67 4923.54,3442.17 4932.87,3442.17 R15.2
NetC16_2: C16.2 R14.1 R18.2 R19.1 | length 174.3
  Bottom Layer w10: R18.2 C16.2 4496.93,3100 R19.1 R14.1
NetC17_1: C17.1 IC3.1 R25.2 R29.1 | length 327.8
  Bottom Layer w10: R25.2 4556.36,4148.58 4560.15,4152.37 4620.76,4152.37 4655,4186.61 R29.1 4655,4242.01 C17.1 4655,4255.16 IC3.1
NetC17_2: C17.2 IC3.2 R28.2 | length 137.5
  Bottom Layer w10: R28.2 4608.43,4192.01 C17.2 4605,4252.01 IC3.2
NetC18_1: C18.1 IC4.1 R26.2 R32.1 | length 203.3
  Bottom Layer w10: R32.1 R26.2 4800,2256.54 C18.1 4805,2195 IC4.1
NetC18_2: C18.2 IC4.2 R31.2 | length 150.8
  Bottom Layer w10: IC4.2 4855,2198.15 C18.2 R31.2
NetC19_2: C19.2 R27.1 R33.1 | length 131.4
  Bottom Layer w10: C19.2 4555,3920.16 R33.1 4591.93,3978.58 4592.28,3978.94 4594.25,3978.94 4605,3989.68 R27.1
NetC20_1: C20.1 R29.2 R35.2 | length 382.1
  Bottom Layer w10: R29.2 R35.2 4655,4056.61 4695.01,4016.61 4695.01,3878.99 4665,3848.98 C20.1
NetC22_1: C22.1 R32.2 R36.2 | length 339
  Bottom Layer w10: C22.1 4730.91,2520.13 4711.25,2500.47 4711.25,2398.75 4720,2390 4730,2390 R36.2 R32.2
NetC23_2: C23.2 R25.1 R27.2 R28.1 | length 199.6
  Bottom Layer w10: R25.1 4513.5,4081.65 4541.06,4109.21 C23.2 4557.44,4121.65 R28.1 R27.2
NetC24_2: C24.2 R26.1 R30.2 R31.1 | length 184.6
  Bottom Layer w10: R30.2@4860,2316.54 4863.46,2313.07 R26.1 4870.39,2266.93 R31.1 4920,2320 C24.2
NetC25_1: C25.1 IC3.7 R37.2 R41.1 | length 269.1
  Bottom Layer w10: R37.2 4495,4719.68 4515.61,4699.07 4575.32,4699.07 4595.61,4678.78 4597.44,4678.78 4608.19,4668.03 R41.1 4605,4662.87 4605,4609.53 IC3.7
NetC25_2: C25.2 IC3.6 R40.2 | length 132.1
  Bottom Layer w10: R40.2 4555,4659.25 IC3.6
NetC26_1: C26.1 IC4.7 R38.2 R44.1 | length 198.7
  Bottom Layer w10: R44.1 C26.1 ; R38.2 4853.43,1763.43 C26.1 ; IC4.7 4855,1821.57 C26.1
NetC26_2: C26.2 IC4.6 R43.2 | length 145.3
  Bottom Layer w10: IC4.6 4905,1821.57 C26.2 4906.57,1763.43 R43.2
NetC27_2: C27.2 R39.1 R45.1 | length 180.7
  Bottom Layer w10: C27.2 4506.22,5008.58 4545,4969.8 4548.19,4966.61 R39.1
NetC28_1: C28.1 R41.2 R47.2 | length 461.6
  Bottom Layer w10: R41.2 R47.2@4608.19,4791.5 ; R47.2 R47.2@4608.19,4791.5 ; C28.1 4663.19,4985.73 4680.05,4968.87 4680.05,4850.95 4631.35,4802.24 4618.94,4802.24 R47.2@4608.19,4791.5
NetC30_1: C30.1 R44.2 R48.2 | length 496.2
  Bottom Layer w10: C30.1 4720,1618.03 4800,1698.03 R48.2 R44.2
NetC31_2: C31.2 R37.1 R39.2 R40.1 | length 174.3
  Bottom Layer w10: C31.2 4495,4838.58 R37.1 4495.94,4789.53 R39.2 R40.1
NetC32_2: C32.2 R38.1 R42.2 R43.1 | length 205.5
  Bottom Layer w10: R38.1 R43.1 4910,1662.68 4938.74,1633.94 C32.2 4938.74,1561.26 R42.2
NetC33_1: C33.1 IC1.8 | length 66.2
  Bottom Layer w10: C33.1 4823.19,3621.42 IC1.8
NetC34_1: C34.1 IC2.8 | length 66.3
  Bottom Layer w10: IC2.8 4666.77,2886.77 C34.1
NetC35_1: C35.1 IC3.8 | length 60.8
  Bottom Layer w10: IC3.8 4656.81,4538.58 C35.1
NetC36_1: C36.1 IC4.8 | length 66.3
  Bottom Layer w10: C36.1 4743.23,1903.23 IC4.8
NetC37_2: C37.2 IC1.4 | length 65.4
  Bottom Layer w10: IC1.4 5037.64,3836.77 C37.2
NetC38_2: C38.2 IC2.4 | length 66.3
  Bottom Layer w10: C38.2 4451.77,2670 IC2.4
NetC39_2: C39.2 IC3.4 | length 61.9
  Bottom Layer w10: C39.2 4449.65,4323.23 IC3.4
NetC40_2: C40.2 IC4.4 | length 66.3
  Bottom Layer w10: IC4.4 4958.23,2120 C40.2
PH_LOUT1: C6.2 J2.3 J2.4 | length 4182.6
  Top Layer w10: v2(3865,2050) v2(4375,2050)
  Bottom Layer w10: v2(4375,2050) C6.2
  Bottom Layer w20: v2(3865,2050) 3865,5309.16 3954.44,5398.6 3977.56,5398.6 3978.2,5399.24 J2.4@3978.2,5422.36 ; J2.3 3940,5525 3979.37,5485.63 J2.4
PH_LOUT2: C22.2 J2.7 J2.8 | length 4064.7
  Top Layer w20: v1(3940,2650) v1(4860,2650)
  Bottom Layer w10: v1(3940,2650) 3940,2717.92 3923.62,2734.29 3923.62,5073.62 4136.85,5286.85 J2.8 4136.85,5485.63 4097.48,5525 J2.7
  Bottom Layer w20: v1(4860,2650) 4860.17,2649.83 4959.26,2649.83 C22.2
PH_ROUT1: C14.2 J2.5 J2.6 | length 2747.7
  Top Layer w20: v2(3896.81,3455) v2(4335,3455)
  Bottom Layer w10: C14.2@4405.91,3455 C14.2
  Bottom Layer w20: v2(3896.81,3455) 3896.81,5296.81 3969.91,5369.91 3998.64,5369.91 4009.18,5380.46 4009.18,5387.53 4028.01,5406.36 4056.3,5406.36 4058.11,5408.17 J2.6 4058.11,5485.63 4018.74,5525 J2.5 ; v2(4335,3455) C14.2@4405.91,3455
PH_ROUT2: C30.2 J2.9 J2.10 | length 5373.3
  Top Layer w10: v2(3945,1475) 4845,1475 v2(4945,1375)
  Bottom Layer w10: v2(3945,1475) 3945,2617.08 3966.81,2638.89 3966.81,2716.56 3945,2738.37 3945,5060 4196.79,5311.79 4196.79,5336.05 4215.59,5354.86 J2.10 4215.59,5485.63 4176.22,5525 J2.9 ; v2(4945,1375) 4958.19,1361.81 C30.2
ROUT1: C11.1 J1.9 J1.10 J1.11 J1.12 | length 1181.8
  Top Layer w10: v1(4909.57,3321.42) 4950.98,3280 5186.96,3280 5215.88,3251.08 5215.88,3121.84 5100,3005.97 5100,2857.56 v1(5175.85,2781.71)
  Bottom Layer w10: v1(4909.57,3321.42) 4909.57,3280.63 4928.78,3261.42 C11.1 ; J1.9 J1.11 v1(5175.85,2781.71) J1.12 J1.10
ROUT2: C27.1 J1.21 J1.22 J1.23 J1.24 | length 2731.5
  Top Layer w10: v1(4597.52,4959.76) 4870.24,4959.76 5270.24,4559.76 5270.24,3072.94 v1(5177.92,2980.63)
  Bottom Layer w10: v1(4597.52,4959.76) 4597.52,5007.95 C27.1 ; J1.23 J1.21 5089.61,2979.59 5176.89,2979.59 v1(5177.92,2980.63) ; v1@5178.95,2979.59 J1.22@5235.18,2979.59 ; J1.24@5235.18,3018.96 J1.24 J1.22
ROUT3: C13.1 J1.33 J1.34 J1.35 J1.36 | length 873.2
  Top Layer w10: v1(4620,3320) 4685.85,3254.15 5174.23,3254.15 v1(5175.19,3253.19)
  Bottom Layer w10: C13.1 4562.27,3329.31 4562.96,3330 4572.96,3320 v1(4620,3320) ; J1.33 J1.35 5089.06,3253.67 5174.71,3253.67 v1(5175.19,3253.19) 5175.67,3253.67 5235.74,3253.67 J1.36 J1.34
pads on no net: J2.13 J2.14 PJ1.4 PJ1.5 PJ1.7 PJ2.4 PJ2.5 PJ2.7 PJ3.4 PJ3.5 PJ3.7 PJ4.4 PJ4.5 PJ4.7
copper on no net: | length 31.5
  Bottom Layer w20: 4026.75,1299.77 4058.25,1299.77

## Polygon pours and split planes (outlines as drawn)
GND_A on Top Layer "NONET_L01_P-001" (solid, remove dead copper, pour order 1): 3600,1180 3610,1170 5314.96,1170 5314.96,5413.39 5108.35,5620 3600,5620
GND_A on Bottom Layer "NONET_L01_P-001" (solid, remove dead copper, pour order 0): 3600,1180 3610,1170 5314.96,1170 5314.96,5413.39 5108.35,5620 3600,5620

## Silkscreen, mask and mechanical layers (free items; w line width, h text height)
Top Overlay:
  lines w10: 3613.35,1536 3615,1536
Board Shape:
  lines w3.94: 3602.36,1181.1 4991.1,1181.1 5314.96,1504.96 5314.96,4705.04 4400,5620 3602.36,5620 3602.36,3129.92 3602.36,1181.1
  lines w5: 4930,1180 4990,1180